# Allegro board SCHEMA_CU_CONECTORI.brd

Outline 40 x 40 mm; copper layers: TOP, MECANIC, BOTTOM. Coordinates in mm from the lower left corner of the outline.
Outline path: rectangle 0,0 40,40

## Design rules (mm)
nets with their own width: min track width 0.45; nets N258420 N258426 N258432 N258490 N258502 N258550 N258592 N258690 N258702 N258718 N258796 N258888 N258914 N258924 N259152 N259208 N259214 N259262
nets with their own width: min track width 0.5; nets V+ V- VO
nets with their own width: min track width 0.667; nets GND

## Placement (name value [footprint] x y rotation side)
C1  5.6n  [CAPC2008X126N_0805]  4.06 24.23 0 top
D1  MLED81  [TO236AA]  35.51 35.32 0 top
D2  BZX84-C2V7  [TO236AA]  12.99 10.16 90 top
D3  BZX84-C2V7  [TO236AA]  24.9 35.81 90 top
D4  BZX84-C2V7  [TO236AA]  24.9 26.52 90 top
J1  CON2  [SMR2512]  2.68 36.78 0 top
J2  CON2  [SMR2512]  3.33 4.12 0 top
J3  CON2  [SMR2512]  22.03 3.54 180 top
NOREF  -  [unnamed]  35.06 5.01 0 top
NOREF#2  -  [unnamed]  4.99 33.11 0 top
P1  10k  [TS53YL]  3.55 16.81 90 top
P2  100  [TS53YL]  28.33 8.74 180 top
Q1  BC856B  [TO236AA]  12.96 30.31 0 top
Q2  BC856B  [TO236AA]  18.73 30.18 0 top
Q3  BC846B  [TO236AA]  17.03 26.34 180 top
Q4  BC846B  [TO236AA]  13.09 24.22 0 top
Q5  BC846B  [TO236AA]  11.28 20.11 180 top
Q6  BC856B  [TO236AA]  16.96 20.11 180 top
Q7  BC846B  [TO236AA]  17.85 11.17 270 top
Q8  QBC817-25  [TO236AA]  28.47 26.56 180 top
Q9  QBC807-25  [TO236AA]  22.23 20 180 top
R1  100  [RES2012X50N_0805]  14.43 36.35 90 top
R2  100  [RES2012X50N_0805]  18.71 36.27 90 top
R3  10k  [RES2012X50N_0805]  4.01 29.94 0 top
R4  10k  [RES2012X50N_0805]  4.01 27.37 180 top
R5  680  [RES2012X50N_0805]  12.08 13.54 180 top
R6  2.2k  [RES2012X50N_0805]  18.85 8.22 0 top
R7  2.7k  [RES2012X50N_0805]  4.03 20.43 180 top
R8  330  [RES2012X50N_0805]  24.36 12.22 270 top
R9  330  [RES2012X50N_0805]  28.42 19.28 90 top
R10  33  [RES2012X50N_0805]  34.53 25.49 180 top
RL1  6.8k  [RES2012X50N_0805]  34.01 15.98 270 top
RL2  2.2k  [RES2012X50N_0805]  32.92 21 0 top

## Library data of the parts
C1 = C
D1 = MLED81_3
D2 D3 = BZX84-C2V7_7
D4 = BZX84-C2V7_9
J1-J3 = CON2
P1 = POT_2
P2 = POT
Q1 Q6 = BC856B
Q2 = BC856B_2
Q3 = BC846B_2
Q4 Q5 Q7 = BC846B_1
Q8 = QBC817-25_0
Q9 = QBC807-25_0
R1-R10 RL1 RL2 = R

## Footprints (pads in the part's own frame, mm; a bottom-side part is the same pattern mirrored in y, then rotated)
CAPC2008X126N_0805
  rect 1.1x0.95 smd: 1(-0.9,0) 2(0.9,0)
RES2012X50N_0805
  rect 0.95x1.45 smd: 1(-1,0) 2(1,0)
SMR2512
  rect 1.93x3.048 smd: 1(0,0) 2(5.994,0)
TO236AA
  rect 1.27x0.914 smd: 1(0,0) 2(0,2.083) 3(-2.057,1.041)
TS53YL
  rect 1.3x1.3 smd: 1(0,0) 3(0,-2.3)
  rect 1.3x2 smd: 2(-5.65,-1.15)
unnamed
  round 1 smd: (0,0)

## Nets
GND: C1.1 D1.3 J1.1 J2.1 J3.2 P2.1 R3.1 R6.2 RL2.1
V+: D3.1 J1.2 Q8.3 R1.2 R2.2 R10.2
V-: D2.1 J2.2 Q9.3 R5.1 R8.1
VO: J3.1 P2.2(T) RL1.2
N258420: Q1.2(E) R1.1
N258426: Q2.2(E) R2.1
N258432: D1.1 R10.1
N258490: D3.3 Q6.2(E)
N258502: Q1.1 Q1.3 Q2.1 Q4.3
N258550: Q2.3 Q3.3 Q6.1
N258592: D4.1 Q6.3 Q8.1
N258690: P1.2(T) P1.3 Q8.2(E) Q9.2(E) R4.2 R9.1
N258702: C1.2 Q4.1 R7.1
N258718: P1.1 R7.2
N258796: D4.3 Q7.3 Q9.1
N258888: Q3.1 R3.2 R4.1
N258914: P2.3 R9.2
N258924: Q3.2(E) Q4.2(E) Q5.3
N259152: D2.3 Q5.1 Q7.1 R6.1
N259208: Q7.2(E) R8.2
N259214: RL1.1 RL2.2
N259262: Q5.2(E) R5.2

Pads without a net: D1 2; D2 2; D3 2; D4 2

## Via types
v1: diameter 0.7, hole 0.4, TOP to BOTTOM, 21 vias

## Routing (per net, layer and track width the routed paths; a pad name or vN(x,y) marks a point on that pad's centre or on a via; arc(x,y) is an arc through that point)
GND: length 105.1
  TOP w0.667: J1.1 2.68,34.8 1.77,33.88 1.77,32.94 3.01,31.7 R3.1 2.07,29.94 1.36,29.23 1.36,24.9 2.03,24.23 3.08,24.23 ; 27.05,8.74 26.38,9.41 v1(26.38,14.21) ; 27.05,8.74 24.8,8.74 24.28,8.22 R6.2 19.85,6.82 19.25,6.22 16.69,6.22 16.04,5.57 J3.2 v1(13.02,3.54) ; 27.05,8.74 P2.1 ; J2.1 v1(3.33,8.29) ; 3.08,24.23 2.98,24.13 v1(2.98,22.51) ; 3.08,24.23 C1.1 ; v1(31.94,23.59) 31.94,22.71 31.92,22.69 RL2.1 ; D1.3 v1(33.45,28.88)
  BOTTOM w0.667: v1(33.45,28.88) 33.45,25.1 v1(31.94,23.59) 31.09,22.74 30.59,22.74 29.92,22.07 29.92,21.03 30.73,20.22 30.73,17.55 27.39,14.21 v1(26.38,14.21) ; v1(13.02,3.54) 13.02,5.5 10.77,7.75 3.87,7.75 v1(3.33,8.29) 3.33,17.31 1.72,18.92 1.72,22.02 2.21,22.51 v1(2.98,22.51)
V+: length 35.4
  TOP w0.5: J1.2 11.23,36.78 11.8,37.35 R1.2 16.38,37.35 16.46,37.27 R2.2 24.55,37.27 24.9,36.92 D3.1 28.4,35.81 30.53,33.68 Q8.3 32.07,25.52 32.1,25.49 R10.2
V-: length 33.9
  TOP w0.5: J2.2 11.49,4.12 14.39,7.02 14.39,9.59 13.82,10.16 D2.1 12.99,11.67 13.08,11.76 R5.1 15.33,13.54 17.94,16.15 19.02,16.15 21.95,13.22 R8.1 24.36,15.2 25.2,16.04 25.2,16.85 24.29,17.76 Q9.3
VO: length 29.9
  TOP w0.5: P2.2 35.8,9.89 ; 35.8,9.89 36.41,9.28 36.41,7.22 35.9,6.71 22.53,6.71 22.03,6.21 J3.1 ; 35.8,9.89 35.88,9.89 36.71,10.72 36.71,14.14 35.87,14.98 RL1.2
N258420: length 4.2
  TOP w0.45: R1.1 14.43,32.8 14.02,32.39 Q1.2
N258426: length 3
  TOP w0.45: Q2.2 18.73,33.8 18.71,33.82 R2.1
N258432: length 9.8
  TOP w0.45: R10.1 35.53,31.63 35.51,31.65 D1.1
N258490: length 22.9
  TOP w0.45: v1(15.3,22.18) 15.3,18.48 15.75,18.03 Q6.2 ; D3.3 23.86,30.73 v1(23.06,29.93)
  BOTTOM w0.45: v1(15.3,22.18) 19.19,22.18 21.1,24.09 21.1,27.97 v1(23.06,29.93)
N258502: length 21
  TOP w0.45: Q4.3 11.03,26.07 10.37,26.73 10.37,30.01 10.9,30.54 Q1.3 12.51,31.35 12.96,30.9 Q1.1 12.96,29.5 13.91,28.55 v1(14.18,28.55) ; v1(19.12,28.55) 20.03,28.55 20.59,29.11 20.59,29.52 20.14,29.97 18.94,29.97 Q2.1
  BOTTOM w0.45: v1(14.18,28.55) v1(19.12,28.55)
N258550: length 13.8
  TOP w0.45: Q2.3 16.67,29.53 19.09,27.11 Q3.3 19.27,25.3 19.97,24.59 19.97,24.09 16.96,21.08 Q6.1
N258592: length 19.3
  TOP w0.45: Q6.3 19.02,21.73 21.12,23.83 21.12,27.38 22.56,28.82 24.58,28.82 24.9,28.5 D4.1 26.61,26.52 26.65,26.56 Q8.1
N258690: length 78.3
  TOP w0.45: v1(23.96,16.37) 22.68,16.37 22.23,16.82 Q9.2 ; Q8.2 28.47,22.49 26.22,20.24 v1(26.22,16.37) 27.79,16.37 28.42,17 R9.1 ; R4.2 3.01,25.91 3.46,25.46 v1(7.83,25.46) ; v1(10.61,21.72) 9.17,23.16 v1(7.83,23.16) ; v1(7.83,23.16) 8.91,22.08 8.91,10.19 8.1,9.38 4.99,9.38 4.7,9.67 P1.2 ; v1(7.83,23.16) 7.83,20.85 5.85,18.87 P1.3
  BOTTOM w0.45: v1(26.22,16.37) v1(23.96,16.37) 21.21,13.62 15.51,13.62 15.06,14.07 15.06,20.15 13.49,21.72 v1(10.61,21.72) ; v1(7.83,25.46) v1(7.83,23.16)
N258702: length 14.3
  TOP w0.45: Q4.1 13.09,23.1 12.24,22.25 11.58,22.25 9.6,24.23 C1.2 4.96,22.54 5.03,22.47 R7.1
N258718: length 3.8
  TOP w0.45: P1.1 3.55,18.14 3.03,18.66 R7.2
N258796: length 14.1
  TOP w0.45: v1(20.38,16.64) 20.38,19.54 20.84,20 Q9.1 22.23,21.16 23.86,22.79 D4.3 ; Q7.3 v1(18.89,14.73)
  BOTTOM w0.45: v1(18.89,14.73) 20.38,16.22 v1(20.38,16.64)
N258888: length 18.1
  TOP w0.45: Q3.1 16.04,26.34 v1(15.26,27.12) ; R4.1 6.81,27.37 7.05,27.61 v1(9.08,27.61) 9.08,28.31 7.45,29.94 R3.2
  BOTTOM w0.45: v1(15.26,27.12) 14.77,27.61 v1(9.08,27.61)
N258914: length 11.8
  TOP w0.45: R9.2 29.81,20.28 30.26,19.83 30.26,17.35 28.33,15.42 28.33,12.95 28.52,12.76 28.52,12.24 28.33,12.04 P2.3
N258924: length 13.4
  TOP w0.45: Q3.2 16.85,24.26 14.81,26.3 13.27,26.3 ; 13.27,26.3 15.02,24.55 15.02,23.63 13.34,21.95 Q5.3 ; 13.27,26.3 Q4.2
N259152: length 29.8
  TOP w0.45: Q7.1 17.74,11.06 16.17,11.06 15.72,10.61 15.72,9.52 ; v1(15.86,7.64) 15.36,8.14 15.36,9.17 15.72,9.52 ; Q5.1 11.1,20.11 10.4,19.4 10.4,19.23 9.76,18.59 9.76,7.93 9.44,7.61 9.44,6.98 9.81,6.6 10.45,6.6 11.06,7.22 11.24,7.22 11.95,7.92 D2.3 12.89,8.1 v1(13.35,7.64) ; 15.72,9.52 17.02,8.22 R6.1
  BOTTOM w0.45: v1(13.35,7.64) v1(15.86,7.64)
N259208: length 4.4
  TOP w0.45: R8.2 22.25,11.22 22.2,11.17 Q7.2
N259214: length 4.1
  TOP w0.45: RL2.2 33.92,18.74 34.01,18.65 RL1.1
N259262: length 4.6
  TOP w0.45: R5.2 11.08,15.86 11.28,16.06 Q5.2

## Text on the board
Ref Des/Silkscreen Top: Florian David | 433E CEF2 - P | 2024 - 2025
XSECTION_CHART: *  SURFACE - AIR 0 MM | L1 TOP CONDUCTOR - COPPER 0.018 MM | * MECANIC DIELECTRIC - FR-4 1.6 MM | L3 BOTTOM CONDUCTOR - COPPER 0.018 MM | DESIGN CROSS SECTION CHART | ___________________________ | TOTAL THICKNESS 1.636 MM | 1-3
PLACE_BOUND_TOP: FIGURE | FINISHED_SIZE | 0.4 | DRILL CHART: TOP to BOTTOM | ALL UNITS ARE IN MILLIMETERS | PLATED | QTY | 21
